# Altium PCB picr22-team-snax-mainboard.PcbDoc
Units mil, origin at the board's own origin, x right, y up, seen from the top; angles counter-clockwise.
Board outline 6000 x 4000 mil, 2 copper layers (Top Layer, Bottom Layer); 75 components, 61 nets, 292 pads, 0 vias.
Unrouted connection lines stored in the file: 194.
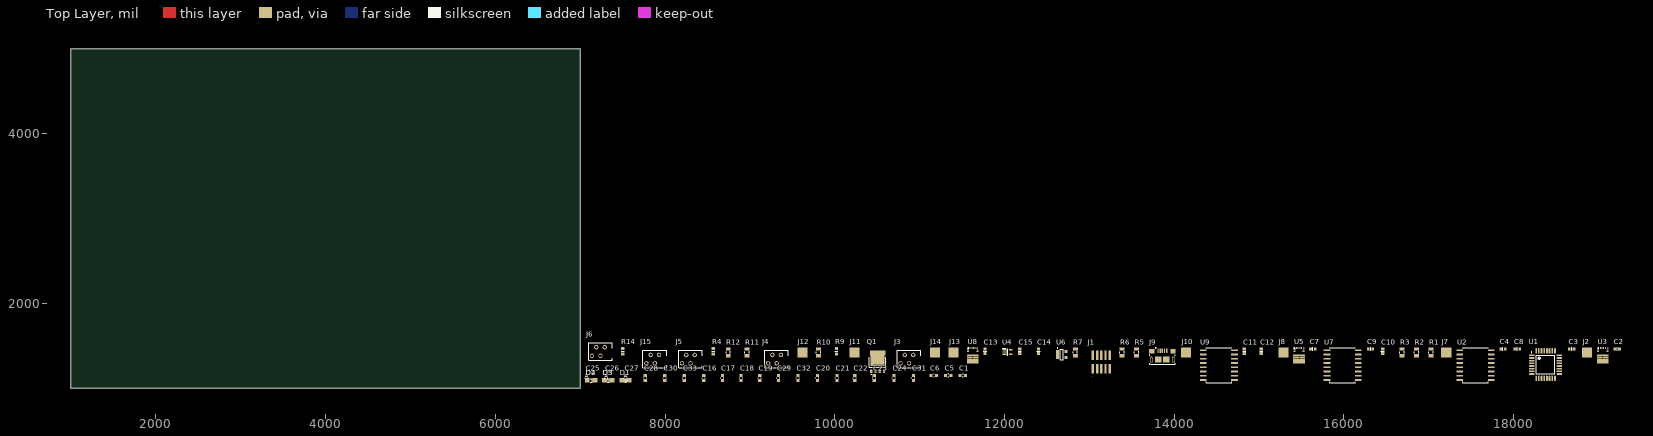
[diagram p0: Top Layer view]
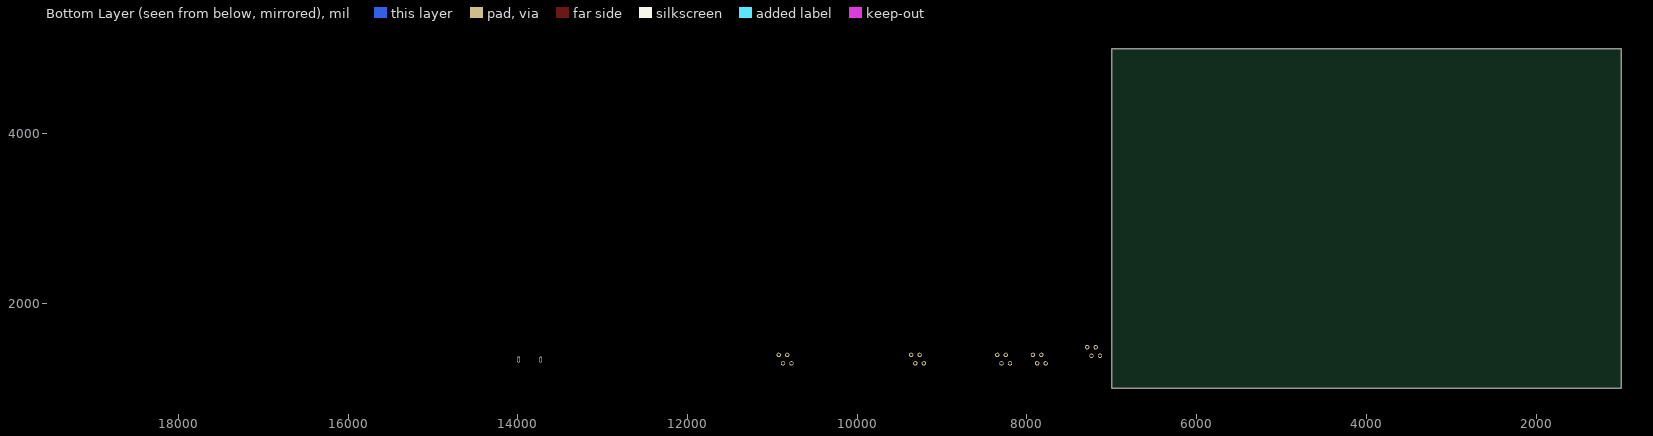
[diagram p1: Bottom Layer view, seen from below]

## Layer stack, top to bottom
Top Solder: solder mask 0.4, Solder Resist, Dk 3.5
Top Layer: signal copper 1.4
Dielectric 1: dielectric 12.6, FR-4, Dk 4.8
Bottom Layer: signal copper 1.4
Bottom Solder: solder mask 0.4, Solder Resist, Dk 3.5

## Board outline
1000,1000 7000,1000 7000,5000 1000,5000

## Design rules (kind name [scope] priority, off if disabled: settings)
Clearance [All] p1: gap=10 ignorepadtopadclearanceinfootprint=FALSE except(0: Arc-Hole Track-Hole SMDPad-Hole THPad-Hole Via-Hole Fill-Hole Poly-Hole Region-Hole Text-Hole)
PolygonConnect [All] p1: connectstyle=Relief reliefconductorwidth=10 reliefentries=4 polygonreliefangle="90 Angle" airgapwidth=10
RoutingVias [All] p1: holewidth=28 width=50 viastyle="Through Hole" minholewidth=28 minwidth=50 maxholewidth=28 maxwidth=50
SolderMaskExpansion [All] p1: expansion=4 istentingtop=FALSE
Width [All] p1: maxlimit=10 minlimit=10 preferedwidth=10
30 further rules are at their usual default settings.

## Components (designator, comment, footprint, x,y, rotation, side; value= is the part's Value field where it differs from the comment)
C1 "Cap_1" CAP_0805 11505,1140 r0 top value="0.1uF 0805"
C2 "Cap" Cap_0603 19250,1465 r0 top value="33uF 0603"
C3 "Cap" Cap_0603 18715,1465 r0 top value="0.1uF 0603"
C4 "Cap" Cap_0603 17905,1465 r0 top value="0.1uF 0603"
C5 "Cap_1" CAP_0805 11335,1140 r0 top value="0.1uF 0805"
C6 "Cap_1" CAP_0805 11165,1140 r0 top value="0.1uF 0805"
C7 "Cap" Cap_0603 15665,1465 r0 top value="33uF 0603"
C8 "Cap" Cap_0603 18075,1465 r0 top value="0.1uF 0603"
C9 "Cap" Cap_0603 16345,1465 r0 top value="0.1uF 0603"
C10 "Cap" Cap_0603 16455,1470 r90 top value="0.1uF 0603"
C11 "Cap" Cap_0603 14825,1470 r90 top value="0.1uF 0603"
C12 "Cap" Cap_0603 15025,1470 r90 top value="0.1uF 0603"
C13 "Cap" Cap_0603 11770,1470 r90 top value="33uF 0603"
C14 "Cap" Cap_0603 12400,1470 r90 top value="1uF 0603"
C15 "Cap" Cap_0603 12180,1470 r90 top value="1uF 0603"
C16 "Cap_1" CAP_0805 8470,1120 r90 top value="10uF 0805"
C17 "Cap_1" CAP_0805 8690,1120 r90 top value="10uF 0805"
C18 "Cap_1" CAP_0805 8910,1120 r90 top value="10uF 0805"
C19 "Cap_1" CAP_0805 9130,1120 r90 top value="10uF 0805"
C20 "Cap_1" CAP_0805 9810,1120 r90 top value="10uF 0805"
C21 "Cap_1" CAP_0805 10040,1120 r90 top value="10uF 0805"
C22 "Cap_1" CAP_0805 10250,1120 r90 top value="10uF 0805"
C23 "Cap_1" CAP_0805 10480,1120 r90 top value="10uF 0805"
C24 "Cap_1" CAP_0805 10710,1120 r90 top value="10uF 0805"
C25 "Cap_1" CAP_0805 7090,1120 r90 top value="10uF 0805"
C26 "Cap_1" CAP_0805 7320,1120 r90 top value="10uF 0805"
C27 "Cap_1" CAP_0805 7550,1120 r90 top value="10uF 0805"
C28 "Cap_1" CAP_0805 7780,1120 r90 top value="10uF 0805"
C29 "Cap_1" CAP_0805 9350,1120 r90 top value="10uF 0805"
C30 "Cap_1" CAP_0805 8010,1120 r90 top value="10uF 0805"
C31 "Cap_1" CAP_0805 10940,1120 r90 top value="100uF 0805"
C32 "Cap_1" CAP_0805 9580,1120 r90 top value="100uF 0805"
C33 "Cap_1" CAP_0805 8240,1120 r90 top value="100uF 0805"
D1 "LED-RED" LED0805R 7490,1095 r0 top
D2 "LED-RED" LED0805R 7085,1095 r0 top
D3 "LED-BLUE" LED0805B 7285,1095 r0 top
D4 "LED-GREEN" LED0805G 7085,1095 r0 top
D5 "LED-RED" LED0805R 7285,1095 r0 top
J1 "FTSH-105-01-L-DV-K" FTSH10501LDVK 13140,1230 r0 top
J2 "M1_2" "3x3mm pad" 18865,1425 r0 top
J3 "215079-4" 2150794 10925,1395 r0 top
J4 "215079-4" 2150794 9365,1395 r0 top
J5 "215079-4" 2150794 8350,1395 r0 top
J6 "215079-4" 2150794 7290,1485 r0 top
J7 "M1_1" "3x3mm pad" 17205,1425 r0 top
J8 "M2_2" "3x3mm pad" 15285,1425 r0 top
J9 "10118193-0001LF" "USB port" 13860,1340 r0 top
J10 "M2_1" "3x3mm pad" 14140,1425 r0 top
J11 "Bat+" "3x3mm pad" 10230,1425 r0 top
J12 "Bat-" "3x3mm pad" 9620,1425 r0 top
J13 "M3_2" "3x3mm pad" 11400,1425 r0 top
J14 "M3_1" "3x3mm pad" 11180,1425 r0 top
J15 "215079-4" 2150794 7930,1395 r0 top
Q1 "BUK6Y10-30P" BUK6Y1440PX 10505,1310 r0 top
R1 "10k" RES_0805 17020,1430 r0 top
R2 "100k 0805" RES_0805 16850,1430 r0 top
R3 "2.7K 0805" RES_0805 16680,1430 r0 top
R4 "1k 0603" RES_0603 8650,1480 r0 top
R5 "10k" RES_0805 13550,1430 r0 top
R6 "2.7K 0805" RES_0805 13380,1430 r0 top
R7 "100k 0805" RES_0805 12830,1430 r0 top
R9 "1k 0603" RES_0603 10100,1480 r0 top
R10 "10k" RES_0805 9805,1430 r0 top
R11 "2.7K 0805" RES_0805 8960,1430 r0 top
R12 "100k 0805" RES_0805 8740,1430 r0 top
R14 "1k 0603" RES_0603 7580,1480 r0 top
U1 "STM32G431KBT6" FP-LQFP32-5V-IPC_B 18375,1280 r0 top
U2 "MAX14930DASE+" SOIC127P1032X265-16N 17550,1275 r0 top
U3 "PDRV8243HRXYQ1" RXY0014A-MFG 19050,1390 r0 top
U4 "CM1223-02SO" SOT65P220X110-5N 12035,1430 r0 top
U5 "PDRV8243HRXYQ1" RXY0014A-MFG 15470,1390 r0 top
U6 "NCV8730ASN500T1G" SOP95P250X265-6N 12675,1400 r0 top
U7 "MAX14930DASE+" SOIC127P1032X265-16N 15985,1275 r0 top
U8 "PDRV8243HRXYQ1" RXY0014A-MFG 11625,1390 r0 top
U9 "MAX14930DASE+" SOIC127P1032X265-16N 14525,1275 r0 top

## Footprints (in the part's own frame and the unit in brackets; to place one, negate y for a bottom-side part, rotate by r counter-clockwise, add the part's x,y. Pads: shape width x height; smd on the part's side, far side on the other; paste and mask are expansions set on the pad)
"3x3mm pad" [mm]
  rect 3x3 smd: 1(0,0)
2150794 [mm]
  round 1.3 hole 0.8: 1(0,0) 2(-1.27,-2.54) 3(-2.54,0) 4(-3.81,-2.54)
  round 0.75 hole 1.5 unplated: 5(1.4,-1.8)
  silkscreen extent -4.82,-3.87 2.28,1.33, body extent -5.37,-3.77 1.67,1.23, height 4.05
BUK6Y1440PX [mm]
  rect 0.7x1.15 smd: 1(-1.905,-2.737) 2(-0.635,-2.737) 3(0.635,-2.737) 4(1.905,-2.737)
  rect 4.7x1.5 smd: 5(0,2.738)
  rect 4.2x3.1 smd: 6(0,0.438)
  silkscreen extent -2.45,-3.8 2.45,1.4, body extent -2.4,-2.97 2.4,3.14, height 1
Cap_0603 [mm]
  rect 0.81x0.99 smd: 1(-1.503,0) 2(-0.123,0)
  silkscreen extent -0.81,-0.48 -0.81,0.48, body extent -1.63,-0.41 0,0.41, height 0.95
CAP_0805 [mm]
  rect 0.9x0.95 smd: 1(0.876,0.356) 2(-0.724,0.356)
  silkscreen extent -0.03,-0.1 0.18,0.81, body extent -0.72,-0.04 0.88,0.76, height 0.55
FP-LQFP32-5V-IPC_B [mm]
  rect 1.655x0.526 smd paste+0 mask+0: 1(-4.125,2.8)
  rrect100% 1.655x0.526 smd paste+0 mask+0: 2(-4.125,2) 3(-4.125,1.2) 4(-4.125,0.4) 5(-4.125,-0.4) 6(-4.125,-1.2) 7(-4.125,-2) 8(-4.125,-2.8) 17(4.125,-2.8) 18(4.125,-2) 19(4.125,-1.2) 20(4.125,-0.4) 21(4.125,0.4) 22(4.125,1.2) 23(4.125,2) 24(4.125,2.8)
  rrect100% 0.526x1.655 smd paste+0 mask+0: 9(-2.8,-4.125) 10(-2,-4.125) 11(-1.2,-4.125) 12(-0.4,-4.125) 13(0.4,-4.125) 14(1.2,-4.125) 15(2,-4.125) 16(2.8,-4.125) 25(2.8,4.125) 26(2,4.125) 27(1.2,4.125) 28(0.4,4.125) 29(-0.4,4.125) 30(-1.2,4.125) 31(-2,4.125) 32(-2.8,4.125)
  silkscreen extent -4.35,-2.75 2.75,3.82, body extent -5.2,-5.2 5.2,5.2, height 0.25
FTSH10501LDVK [mm]
  rect 0.74x2.79 smd: 1(-2.54,0) 2(-2.54,4.07) 3(-1.27,0) 4(-1.27,4.07) 5(0,0) 6(0,4.07) 7(1.27,0) 8(1.27,4.07) 9(2.54,0) 10(2.54,4.07)
  silkscreen extent -2.6,-2.25 -2.5,-2.15, body extent -3.17,-0.92 3.17,4.93, height 6.13
LED0805B [mil] "SMD; Blue LED; Body 2.1 x 1.35 mm"
  rect 55x50 smd: A(0,0) K(90,0)
  silkscreen extent 35,-20 55,20, body extent 6,-26 85,24, height 39
LED0805G [mil] "SMD; Green LED; Body 2.1 x 1.35 mm"
  rect 55x50 smd: A(0,0) K(90,0)
  silkscreen extent 35,-20 55,20, body extent 6,-26 85,24, height 39
LED0805R [mil] "SMD; Red LED; Body 2.1 x 1.35 mm"
  rect 55x50 smd: A(0,0) K(90,0)
  silkscreen extent 35,-20 55,20, body extent 7,-25 85,25, height 39
RES_0603 [mil]
  rect 39.37x35 smd: 1(-80,-73) 2(-80,-12)
  silkscreen extent -98,-43 -62,-43, body extent -96,-75 -64,-12, height 35
RES_0805 [mm]
  rect 1.45x0.95 smd: 1(0.127,-1.127) 2(0.127,0.873)
  silkscreen extent -0.53,-0.4 0.76,0.14, body extent -0.5,-1.15 0.75,0.9, height 0.5
RXY0014A-MFG [mm]
  rect 0.6x0.25 smd paste+0 mask-0.292: 1(-1.4,1.625) 2(-1.4,1.125) 3(-1.4,0.625) 8(1.4,0.625) 9(1.4,1.125) 10(1.4,1.625)
  rect 3.5x0.5 smd paste-1.737 mask-1.74: 4(0,0.05)
  rect 1.675x0.5 smd paste-0.825 mask-0.826: 5(-0.913,-0.65) 7(0.913,-0.65)
  rect 3.5x1.4 smd paste-1.737 mask-1.74: 6(0,-1.8)
  rect 0.25x0.6 smd paste+0 mask-0.292: 11(0.75,2.15) 12(0.25,2.15) 13(-0.25,2.15) 14(-0.75,2.15)
  silkscreen extent -1.55,1.98 1.55,2.3, body extent -1.5,-2.25 1.5,2.25, height 1
SOIC127P1032X265-16N [mil]
  rect 78x22 smd: 1(-185,175) 2(-185,125) 3(-185,75) 4(-185,25) 5(-185,-25) 6(-185,-75) 7(-185,-125) 8(-185,-175) 9(185,-175) 10(185,-125) 11(185,-75) 12(185,-25) 13(185,25) 14(185,75) 15(185,125) 16(185,175)
  silkscreen extent -150,-207 150,207
SOP95P250X265-6N [mm] "SOP, 6-Leads, Body 3.00x1.50mm, Pitch 0.95mm, IPC Medium Density"
  rect 0.85x0.9 smd: 1(-1.275,0.95) 2(-1.275,0) 3(-1.275,-0.95) 4(1.275,-0.95) 5(1.275,0.95)
  silkscreen extent -1.4,-1.6 0.45,2.07
SOT65P220X110-5N [mm]
  rect 1.1x0.4 smd: 1(-1,0.65) 2(-1,0) 3(-1,-0.65) 4(1,-0.65) 5(1,0.65)
  silkscreen extent -1.55,-1.02 0.1,1.1, body extent -1.1,-1.02 1.1,1.02, height 1.1
"USB port" [mm]
  rect 0.4x1.35 smd: 1(-1.3,2.675) 2(-0.65,2.675) 3(0,2.675) 4(0.65,2.675) 5(1.3,2.675)
  rect 1.6x1.4 smd: S1(-3.2,2.45) S2(3.2,2.45)
  rect 1.9x1.9 smd: S3(1.2,0) S4(-1.2,0)
  oval 0.9x1.8 hole 0.5 slot 1.2 at 90 deg: S5(-3.3,0) S6(3.3,0)
  silkscreen extent -3.8,-1.45 3.8,3.6, body extent -3.93,-2.79 3.93,2.87, height 2.88

## Part data
C1 C2 C3 C4 C5 C6 C7 C8 C9 C10 C11 C12 C13 C14 C15 C16 C17 C18 C19 C20 C21 C22 C23 C24 C25 C26 C27 C28 C29 C30 C31 C32 C33: "Capacitor", LatestRevisionDate=17-Jul-2002, LatestRevisionNote="Re-released for DXP Platform.", PackageDescription="Radial Cap, Thru-Hole; 2 Leads; 0.3 in Pin Spacing", PackageReference=RAD-0.3, Published=8-Jun-2000, Publisher="Altium Limited"
D1 D2 D5: library part "SMD 0805 LED-RED", "RED LED, Case 0805", Supplier Part Number 1=1581239, Supplier 1=Farnell
D3: library part "SMD 0805 LED-BLUE", "BLUE LED, Case 0805", Supplier Part Number 1=1850746, Supplier 1=Farnell
D4: library part "SMD 0805 LED-GREEN", "GREEN  LED,Case 0805", Supplier Part Number 1=1716766, Supplier 1=Farnell
J1: "Connector", Manufacturer_Name=SAMTEC, Mouser Part Number=200-FTSH10501LDVK, Arrow Part Number=FTSH-105-01-L-DV-K, Arrow Price/Stock=https://www.arrow.com/en/products/ftsh-105-01-l-dv-k/samtec?region=europe, Datasheet Link=https://www.arrow.com/en/products/ftsh-105-01-l-dv-k/samtec, Height=6.1mm, Manufacturer_Part_Number=FTSH-105-01-L-DV-K, Mouser Price/Stock=https://www.mouser.co.uk/ProductDetail/Samtec/FTSH-105-01-L-DV-K?qs=%252B5JSS813miOqo3Vy%252BvhCFg%3D%3D
J2 J7 J8 J10 J11 J12 J13 J14: library part "Connector pad"
J3 J4 J5 J6 J15: "Connector", Manufacturer_Name="TE Connectivity", Mouser Part Number=571-215079-4, Arrow Part Number=215079-4, Arrow Price/Stock=https://www.arrow.com/en/products/215079-4/te-connectivity, Datasheet Link=https://www.te.com/commerce/DocumentDelivery/DDEController?Action=srchrtrv&DocNm=215079&DocType=Customer+Drawing&DocLang=English, Height=4.2mm, Manufacturer_Part_Number=215079-4, Mouser Price/Stock=https://www.mouser.co.uk/ProductDetail/TE-Connectivity/215079-4?qs=O3N86PA0UL%252BdoZEVcFx8sQ%3D%3D
J9: "USB - micro B USB 2.0 Receptacle Connector 5 Position Surface Mount, Right Angle; Through Hole", Package=None, Availability=Unavailable, MF="Amphenol ICC", MP=10118193-0001LF, Price=None, SnapEDA_Link=https://www.snapeda.com/parts/10118193-0001LF/Amphenol%20FCI/view-part/2758989/?ref=snap
Q1: library part BUK6Y14-40PX, "MOSFET (P-Channel)", Manufacturer_Name=Nexperia, Mouser Part Number=771-BUK6Y14-40PX, Datasheet Link=https://assets.nexperia.com/documents/data-sheet/BUK6Y14-40P.pdf, Height=1.2mm, Manufacturer_Part_Number=BUK6Y14-40PX, Mouser Price/Stock=https://www.mouser.co.uk/ProductDetail/Nexperia/BUK6Y14-40PX?qs=vmHwEFxEFR91d%252BcXKqAEkw%3D%3D
R1 R2 R3 R5 R6 R7 R10 R11 R12: library part Res1_1, "Resistor", LatestRevisionDate=17-Jul-2002, LatestRevisionNote="Re-released for DXP Platform.", PackageDescription="Axial Device, Thru-Hole; 2 Leads; 0.3 in Pin Spacing", PackageReference=AXIAL-0.3, Published=8-Jun-2000, Publisher="Altium Limited"
R4 R9 R14: library part Res1, "Resistor", LatestRevisionDate=17-Jul-2002, LatestRevisionNote="Re-released for DXP Platform.", PackageDescription="Axial Device, Thru-Hole; 2 Leads; 0.3 in Pin Spacing", PackageReference=AXIAL-0.3, Published=8-Jun-2000, Publisher="Altium Limited"
U1: library part CMP-12105-000140-1, "IC MCU 32BIT 128KB FLASH 32LQFP"
U2 U7 U9: library part MAX14930DAWE+, "Integrated Circuit", Manufacturer_Name="Maxim Integrated", Mouser Part Number=700-MAX14930DAWE+, Datasheet Link=https://datasheets.maximintegrated.com/en/ds/MAX14130-MAX14932.pdf, Height=2.65mm, Manufacturer_Part_Number=MAX14930DAWE+, Mouser Price/Stock=https://www.mouser.co.uk/ProductDetail/Maxim-Integrated/MAX14930DAWE%2b?qs=AAveGqk956FMXGKxABEd7w%3D%3D
U3 U5 U8: "No Description Available", Mfr_Name="Texas Instruments", Copyright="Copyright (C) 2022 Ultra Librarian. All rights reserved.", Manufacturer_Part_Number=PDRV8243HRXYQ1, RefDes=RefDes, Type=DEV
U4: library part SP3003-02JTG, "Integrated Circuit", Manufacturer_Name=LITTELFUSE, Mouser Part Number=576-SP3003-02JTG, Arrow Part Number=SP3003-02JTG, Arrow Price/Stock=https://www.arrow.com/en/products/sp3003-02jtg/littelfuse?region=nac, Datasheet Link=https://datasheet.datasheetarchive.com/originals/distributors/Datasheets-DGA26/1840396.pdf, Height=1.1mm, Manufacturer_Part_Number=SP3003-02JTG, Mouser Price/Stock=https://www.mouser.co.uk/ProductDetail/Littelfuse/SP3003-02JTG?qs=je4hkJKt%2FJ1VE%2FhJSW73jg%3D%3D

## Nets (pads, with @x,y where several pads share a name; then routed paths per layer and width w, separated by ;. In a path a pad name is that pad's centre, name@x,y a point inside that pad or via, vN(x,y) a via of type N, cw(c..) or ccw(c..) an arc to the next point about the centre after c; other vN are vias at no path point)
+3.3: C1.2 C4.1 C5.2 C6.2 C9.1 C11.1 D4.A J1.1 J3.2 J4.2 J5.2 U1.1 U1.15 U1.17 U2.1 U7.1 U9.1
+5: C8.2 C10.2 C12.2 C15.2 D3.A J9.1 J15.1 R1.2 R5.2 R10.2 U2.16 U4.5 U6.5 U7.16 U9.16
+16.8: C2.2 C7.2 C13.2 C14.2 C31.2 C32.2 C33.2 D1.A D2.A D5.A Q1.1 Q1.2 Q1.3 U3.4 U5.4 U6.1 U6.3 U8.4
Bat-: C2.1 C7.1 C8.1 C10.1 C12.1 C13.1 C14.1 C15.1 C16.1 C17.1 C18.1 C19.1 C20.1 C21.1 C22.1 C23.1 C24.1 C25.1 C26.1 C27.1 C28.1 C29.1 C30.1 C31.1 C32.1 C33.1 J6.1 J12.1 J15.3 J15.4 Q1.4 R3.2 R6.2 R11.2 U2.9 U2.15 U6.2 U7.9 U7.15 U9.9 U9.15
DIR_M1: U1.5 U2.4
DIR_M1_OUT: U2.13 U3.10
DIR_M2: U1.7 U7.4
DIR_M2_OUT: U5.10 U7.13
DIR_M3: U1.9 U7.6
DIR_M3_OUT: U7.11 U8.10
DRV_OFF: U1.12 U9.4
DRV_OFF_OUT: U3.8 U5.8 U8.8 U9.13
NetC16_2: C16.2 C17.2 C18.2 C19.2 C29.2 R4.2
NetC20_2: C20.2 C21.2 C22.2 C23.2 C24.2 R9.2
NetC25_2: C25.2 C26.2 C27.2 C28.2 C30.2 R14.2
NetD1_K: D1.K R9.1
NetD2_K: D2.K R14.1
NetD5_K: D5.K R4.1
NetJ2_1: J2.1 U3.7
NetJ7_1: J7.1 U3.5
NetJ8_1: J8.1 U5.7
NetJ10_1: J10.1 U5.5
NetJ11_1: J11.1 Q1.5 Q1.6
NetJ13_1: J13.1 U8.7
NetJ14_1: J14.1 U8.5
NetR1_1: R1.1 U3.1
NetR2_1: R2.1 U3.6 U3.11 U3.14
NetR2_2: R2.2 U3.13
NetR3_1: R3.1 U3.2
NetR5_1: R5.1 U5.1
NetR6_1: R6.1 U5.2
NetR7_1: R7.1 U5.6 U5.11 U5.14
NetR7_2: R7.2 U5.13
NetR10_1: R10.1 U8.1
NetR11_1: R11.1 U8.2
NetR12_1: R12.1 U8.6 U8.11 U8.14
NetR12_2: R12.2 U8.13
NRST: C3.2 J1.10 U1.4
nSLEEP_MCU: U1.25 U2.6
nSLEEP_MCU_OUT: U2.11 U3.3 U5.3 U8.3
PWM_M1: U1.6 U2.3
PWM_M1_OUT: U2.14 U3.9
PWM_M2: U1.8 U7.3
PWM_M2_OUT: U5.9 U7.14
PWM_M3: U1.10 U7.5
PWM_M3_OUT: U7.12 U8.9
PWM_THROWER: U1.31 U2.5
PWM_THROWER_OUT: J6.2 U2.12
SERVO_M1: U1.11 U9.3
SERVO_M1_OUT: J15.2 U9.14
SGND: C1.1 C3.1 C4.2 C5.1 C6.1 C9.2 C11.2 D3.K D4.K J1.3 J1.5 J1.9 J3.1 J4.1 J5.1 J9.5 U1.14 U1.16 U1.32 U2.2 U2.8 U4.2 U7.2 U7.8 U9.2 U9.8
SWCLK: J1.4 U1.24
SWDIO: J1.2 U1.23
TIM1_CH1: J3.3 U1.18
TIM1_CH2: J3.4 U1.19
TIM2_CH1: J4.3 U1.27
TIM2_CH2: J4.4 U1.28
TIM3_CH1: J5.3 U1.29
TIM3_CH2: J5.4 U1.30
USB_DM: J9.2 U1.21 U4.4
USB_DP: J9.3 U1.22 U4.3
pads on no net: J1.6 J1.7 J1.8 J3.5 J4.5 J5.5 J6.3 J6.4 J6.5 J9.4 J9.S1 J9.S2 J9.S3 J9.S4 J9.S5 J9.S6 J15.5 U1.2 U1.3 U1.13 U1.20 U1.26 U2.7 U2.10 U3.12 U4.1 U5.12 U6.4 U7.7 U7.10 U8.12 U9.5 U9.6 U9.7 U9.10 U9.11 U9.12